# Altium PCB PCB.PcbDoc
Units mil, origin at the board's own origin, x right, y up, seen from the top; angles counter-clockwise.
Board outline 6000 x 4000 mil, 2 copper layers (Top Layer, Bottom Layer); 13 components, 143 nets, 84 pads, 0 vias.
Unrouted connection lines stored in the file: 27.
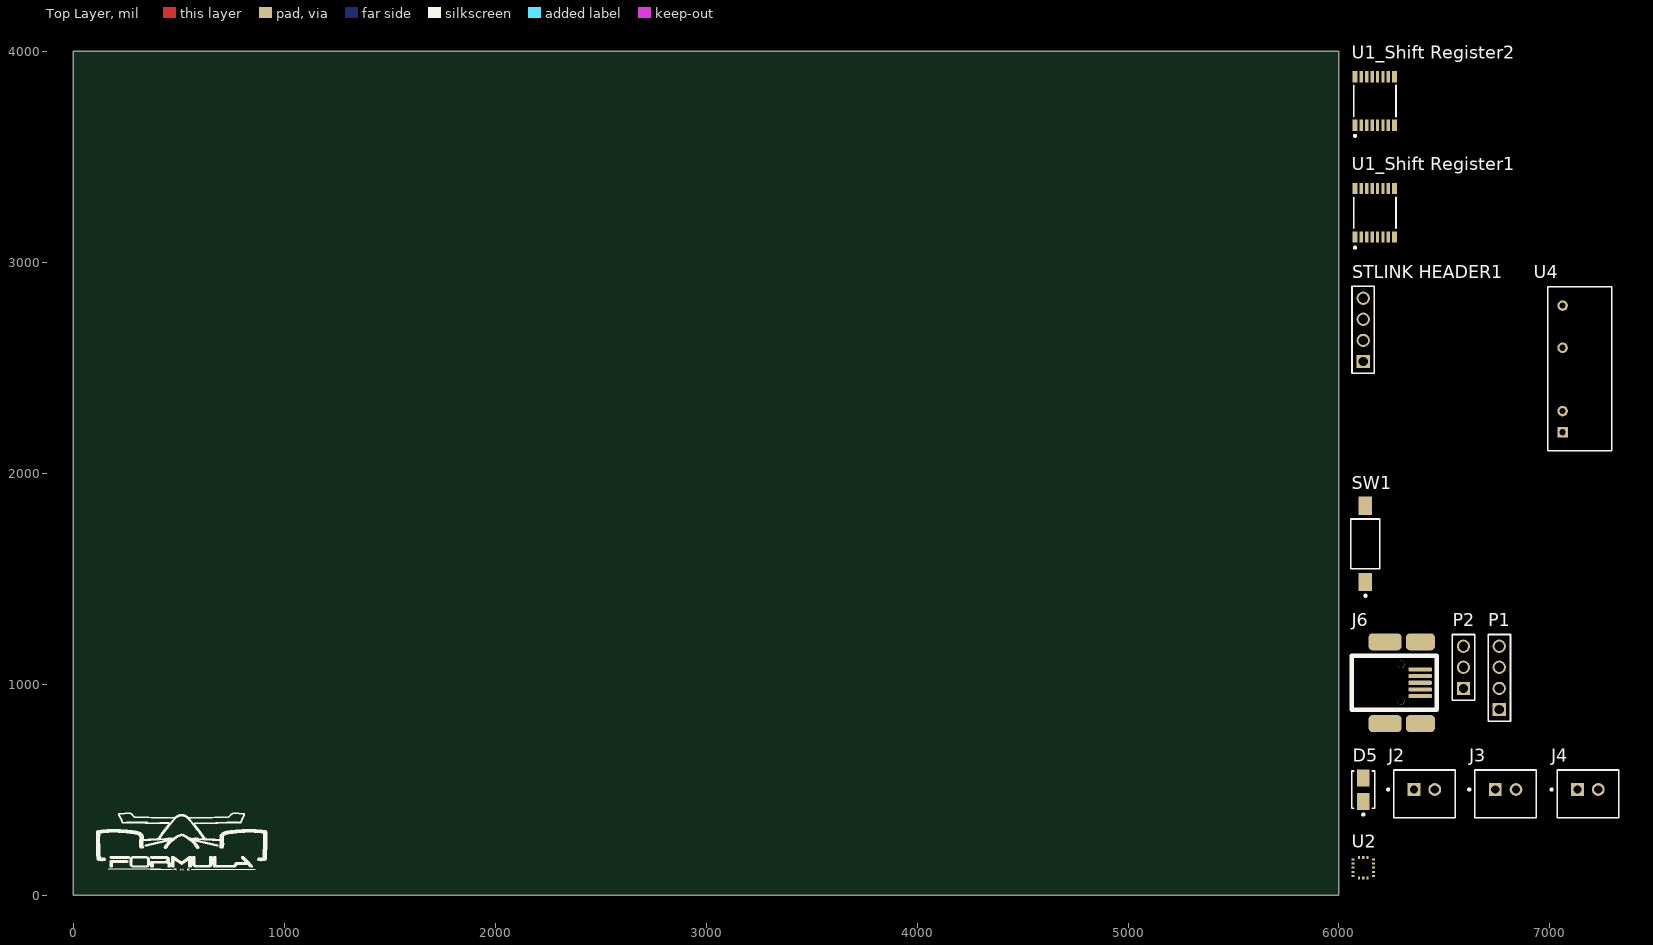
[diagram p0: Top Layer view]
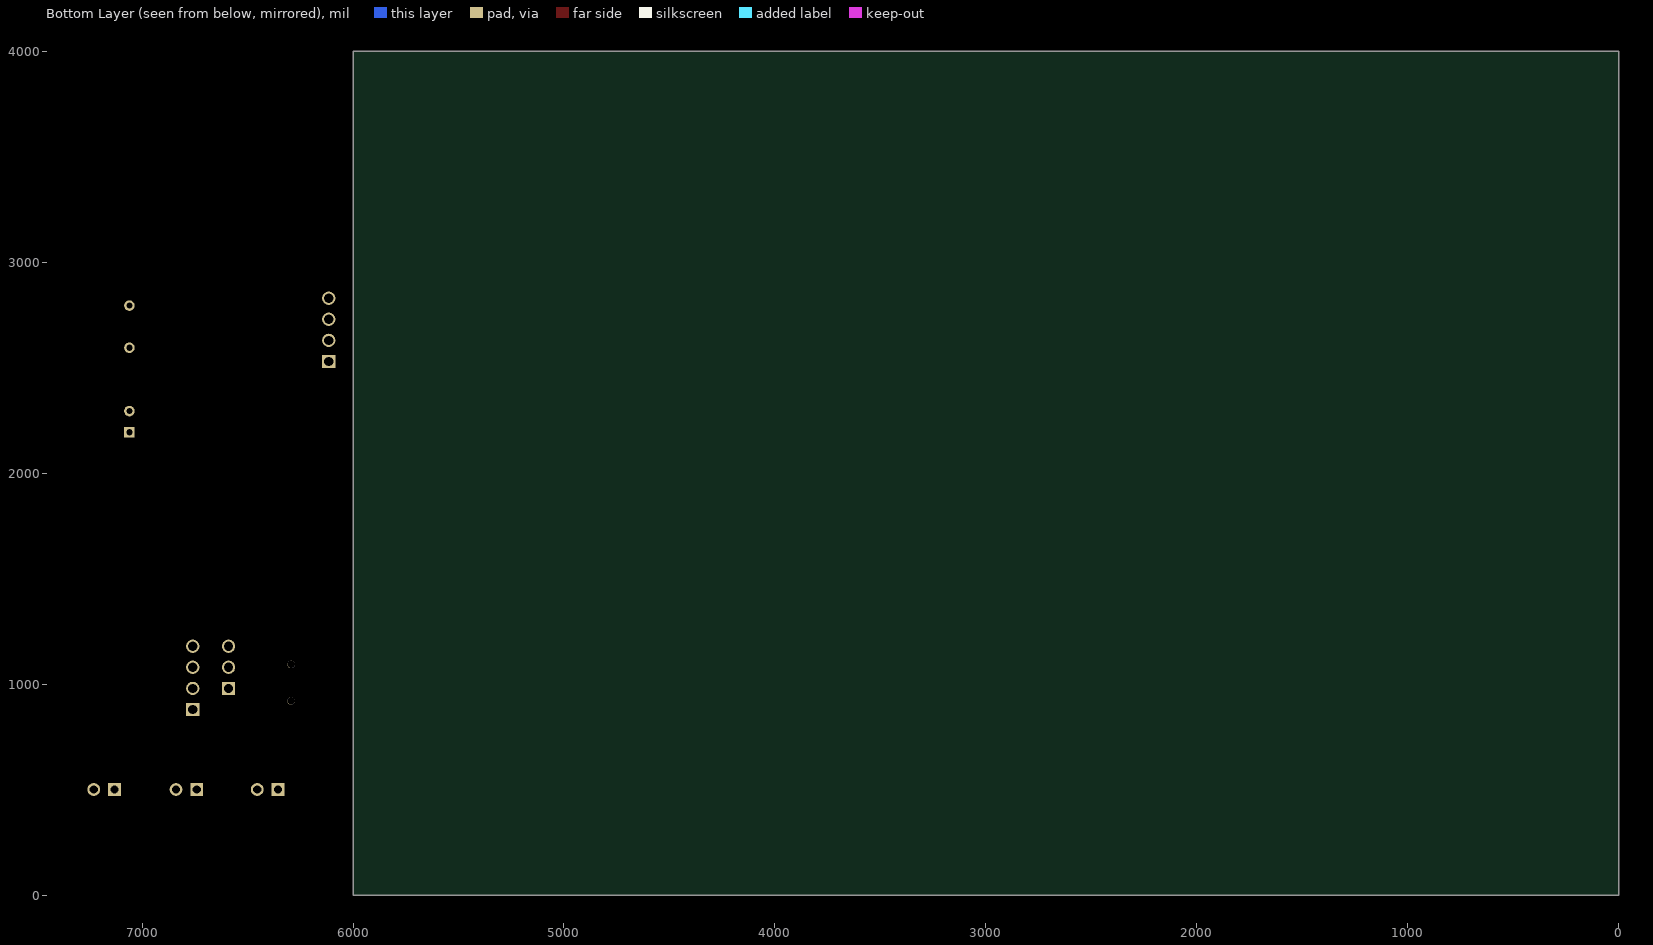
[diagram p1: Bottom Layer view, seen from below]

## Layer stack, top to bottom
Top Solder: solder mask 0.4, Solder Resist, Dk 3.5
Top Layer: signal copper 1.4
Dielectric 1: dielectric 12.6, FR-4, Dk 4.8
Bottom Layer: signal copper 1.4
Bottom Solder: solder mask 0.4, Solder Resist, Dk 3.5

## Board outline
0,0 6000,0 6000,4000 0,4000

## Design rules (kind name [scope] priority, off if disabled: settings)
BoardOutlineClearance [All] p1: gap=7.87 ignorepadtopadclearanceinfootprint=FALSE
Clearance [All] p1: gap=5 ignorepadtopadclearanceinfootprint=FALSE except(9.84: Arc-Hole Track-Hole SMDPad-Hole THPad-Hole Via-Hole Fill-Hole Poly-Hole Region-Hole Text-Hole)
ComponentClearance [All] p1: gap=5 collisioncheckmode=3 verticalgap=5 showdistances=TRUE
DiffPairsRouting [All] p1: maxlimit=10 minlimit=5 mostfreqgap=5 toplayer_minwidth=5 toplayer_maxwidth=1000 toplayer_prefwidth=5 bottomlayer_minwidth=5 bottomlayer_maxwidth=1000 bottomlayer_prefwidth=5 maxuncoupledlength=500
Height [All] p1: minheight=0 maxheight=71497.94 prefheight=500
HoleSize [All] p1: absolutevalues=TRUE maxlimit=248.03 minlimit=11.81 maxpercent=80.000 minpercent=20.000
HoleToHoleClearance [All] p1: gap=9.84 allowstackedmicrovias=FALSE
MinimumAnnularRing [All] p1: minimumring=3
MinimumSolderMaskSliver [All] p1: minsoldermaskwidth=0
PlaneClearance [All] p1: clearance=5
PlaneConnect PlaneConnectPowerPads [InPadClass('PowerPads')] p1: planeconnectstyle=Direct reliefexpansion=20 reliefentries=4 reliefconductorwidth=10 reliefairgap=10
PlaneConnect [All] p2: pad.planeconnectstyle=Relief pad.reliefexpansion=11.81 pad.reliefentries=4 pad.reliefconductorwidth=5 pad.reliefairgap=5 via.planeconnectstyle=Direct via.reliefexpansion=11.81 via.reliefentries=4 via.reliefconductorwidth=5 via.reliefairgap=5
PolygonConnect PolygonConnectPowerPads [All vs (InPadClass('PowerPads'))] p1: connectstyle=Direct reliefconductorwidth=10 reliefentries=4 polygonreliefangle="90 Angle" airgapwidth=10
PolygonConnect [All] p2: thpad.connectstyle=Relief thpad.reliefconductorwidth=5 thpad.reliefentries=4 thpad.polygonreliefangle="90 Angle" thpad.airgapwidth=5 smdpad.connectstyle=Relief smdpad.reliefconductorwidth=5 smdpad.reliefentries=4 smdpad.polygonreliefangle="90 Angle" smdpad.airgapwidth=5 via.connectstyle=Direct via.reliefconductorwidth=5 via.reliefentries=4 via.polygonreliefangle="90 Angle" via.airgapwidth=5
RoomDefinition TOP [InComponentClass('TOP')] p1: confinementstyle=ConfineIn formatcopy=TRUE lockcomponents=FALSE outline 6045,2050 7310,2050 7310,3000 6045,3000
RoomDefinition "STM32 Microcontroller" [InComponentClass('STM32 Microcontroller')] p2: confinementstyle=ConfineIn formatcopy=TRUE lockcomponents=FALSE outline -1000,-1000 1000,-1000 1000,0 -1000,0
RoomDefinition Steering [InComponentClass('Steering')] p3: confinementstyle=ConfineIn formatcopy=TRUE lockcomponents=FALSE outline -1000,-1000 1000,-1000 1000,0 -1000,0
RoomDefinition "Shift Register2" [InComponentClass('Shift Register2')] p4: confinementstyle=ConfineIn formatcopy=TRUE lockcomponents=FALSE outline 6045,3580 7080,3580 7080,4065 6045,4065
RoomDefinition "Shift Register1" [InComponentClass('Shift Register1')] p5: confinementstyle=ConfineIn formatcopy=TRUE lockcomponents=FALSE outline 6045,3050 7060,3050 7060,3530 6045,3530
RoomDefinition POWER [InComponentClass('POWER')] p6: confinementstyle=ConfineIn formatcopy=TRUE lockcomponents=FALSE outline -1000,-1000 1000,-1000 1000,0 -1000,0
RoomDefinition "Motor Controller 2" [InComponentClass('Motor Controller 2')] p7: confinementstyle=ConfineIn formatcopy=TRUE lockcomponents=FALSE outline -1000,-1000 1000,-1000 1000,0 -1000,0
RoomDefinition "Motor Controller 1" [InComponentClass('Motor Controller 1')] p8: confinementstyle=ConfineIn formatcopy=TRUE lockcomponents=FALSE outline -1000,-1000 1000,-1000 1000,0 -1000,0
RoomDefinition MCU [InComponentClass('MCU')] p9: confinementstyle=ConfineIn formatcopy=TRUE lockcomponents=FALSE outline 6045,1400 6220,1400 6220,2000 6045,2000
RoomDefinition Designator9 [InComponentClass('Designator9')] p10: confinementstyle=ConfineIn formatcopy=TRUE lockcomponents=FALSE outline -1000,-1000 1000,-1000 1000,0 -1000,0
RoomDefinition Designator8 [InComponentClass('Designator8')] p11: confinementstyle=ConfineIn formatcopy=TRUE lockcomponents=FALSE outline -1000,-1000 1000,-1000 1000,0 -1000,0
RoomDefinition Designator7 [InComponentClass('Designator7')] p12: confinementstyle=ConfineIn formatcopy=TRUE lockcomponents=FALSE outline -1000,-1000 1000,-1000 1000,0 -1000,0
RoomDefinition Designator6 [InComponentClass('Designator6')] p13: confinementstyle=ConfineIn formatcopy=TRUE lockcomponents=FALSE outline -1000,-1000 1000,-1000 1000,0 -1000,0
RoomDefinition Designator5 [InComponentClass('Designator5')] p14: confinementstyle=ConfineIn formatcopy=TRUE lockcomponents=FALSE outline -1000,-1000 1000,-1000 1000,0 -1000,0
RoomDefinition Designator4 [InComponentClass('Designator4')] p15: confinementstyle=ConfineIn formatcopy=TRUE lockcomponents=FALSE outline -1000,-1000 1000,-1000 1000,0 -1000,0
RoomDefinition Designator3 [InComponentClass('Designator3')] p16: confinementstyle=ConfineIn formatcopy=TRUE lockcomponents=FALSE outline -1000,-1000 1000,-1000 1000,0 -1000,0
RoomDefinition Designator2 [InComponentClass('Designator2')] p17: confinementstyle=ConfineIn formatcopy=TRUE lockcomponents=FALSE outline -1000,-1000 1000,-1000 1000,0 -1000,0
RoomDefinition Designator1 [InComponentClass('Designator1')] p18: confinementstyle=ConfineIn formatcopy=TRUE lockcomponents=FALSE outline -1000,-1000 1000,-1000 1000,0 -1000,0
RoomDefinition Connectors [InComponentClass('Connectors')] p19: confinementstyle=ConfineIn formatcopy=TRUE lockcomponents=FALSE outline 6045,760 6830,760 6830,1350 6045,1350
RoomDefinition CONNECTORS [InComponentClass('CONNECTORS')] p20: confinementstyle=ConfineIn formatcopy=TRUE lockcomponents=FALSE outline 6045,760 6830,760 6830,1350 6045,1350
RoomDefinition CAN2 [InComponentClass('CAN2')] p21: confinementstyle=ConfineIn formatcopy=TRUE lockcomponents=FALSE outline -1000,-1000 1000,-1000 1000,0 -1000,0
RoomDefinition CAN1 [InComponentClass('CAN1')] p22: confinementstyle=ConfineIn formatcopy=TRUE lockcomponents=FALSE outline -1000,-1000 1000,-1000 1000,0 -1000,0
RoomDefinition "Accelerometer And Gyro" [InComponentClass('Accelerometer And Gyro')] p23: confinementstyle=ConfineIn formatcopy=TRUE lockcomponents=FALSE outline 6045,60 6185,60 6185,300 6045,300
RoomDefinition "12V Power And Ground" [InComponentClass('12V Power And Ground')] p24: confinementstyle=ConfineIn formatcopy=TRUE lockcomponents=FALSE outline -1000,-1000 1000,-1000 1000,0 -1000,0
RoomDefinition "5V Power and Ground" [InComponentClass('5V Power and Ground')] p25: confinementstyle=ConfineIn formatcopy=TRUE lockcomponents=FALSE outline -1000,-1000 1000,-1000 1000,0 -1000,0
RoomDefinition 5VLS6 [InComponentClass('5VLS6')] p26: confinementstyle=ConfineIn formatcopy=TRUE lockcomponents=FALSE outline -1000,-1000 1000,-1000 1000,0 -1000,0
RoomDefinition 5VLS5 [InComponentClass('5VLS5')] p27: confinementstyle=ConfineIn formatcopy=TRUE lockcomponents=FALSE outline -1000,-1000 1000,-1000 1000,0 -1000,0
RoomDefinition 5VLS4 [InComponentClass('5VLS4')] p28: confinementstyle=ConfineIn formatcopy=TRUE lockcomponents=FALSE outline -1000,-1000 1000,-1000 1000,0 -1000,0
RoomDefinition 5VLS3 [InComponentClass('5VLS3')] p29: confinementstyle=ConfineIn formatcopy=TRUE lockcomponents=FALSE outline -1000,-1000 1000,-1000 1000,0 -1000,0
RoomDefinition 5VLS2 [InComponentClass('5VLS2')] p30: confinementstyle=ConfineIn formatcopy=TRUE lockcomponents=FALSE outline -1000,-1000 1000,-1000 1000,0 -1000,0
RoomDefinition 5VLS1 [InComponentClass('5VLS1')] p31: confinementstyle=ConfineIn formatcopy=TRUE lockcomponents=FALSE outline -1000,-1000 1000,-1000 1000,0 -1000,0
RoutingVias [All] p1: holewidth=11.81 width=23.62 viastyle="Through Hole" minholewidth=11.81 minwidth=23.62 maxholewidth=23.62 maxwidth=259.84
SilkToSilkClearance [All] p1: silktosilkclearance=0
SilkToSolderMaskClearance [IsPad] p1: minsilkscreentomaskgap=5 clearancetoexposedcopper=TRUE
SolderMaskExpansion [All] p1: expansion=2.95 istentingtop=FALSE
Width [All] p1: maxlimit=1000 minlimit=5 preferedwidth=5 minimp=50.000000 maximp=50.000000 favimp=50.000000
20 further rules are at their usual default settings.

## Classes and differential pairs
channel class Single_12V: "Motor Controller 1" "Motor Controller 2" Steering
channel class shiftRegister: "Shift Register1" "Shift Register2"
channel class CAN: CAN1 CAN2
channel class 12V_LS: Designator1 Designator2 Designator3 Designator4 Designator5 Designator6 Designator7 Designator8 Designator9
channel class 5V_LS: 5VLS1 5VLS2 5VLS3 5VLS4 5VLS5 5VLS6
component class Steering: J8_Steering
component class "Shift Register2": "C41_Shift Register2" "U1_Shift Register2"
component class "Shift Register1": "C41_Shift Register1" "U1_Shift Register1"
component class POWER: C34 C35 C36 C37 D3 D4 R22 R23 VR1
component class "Motor Controller 2": "J8_Motor Controller 2"
component class "Motor Controller 1": "J8_Motor Controller 1"
component class Designator9: C38_Designator9 C39_Designator9 C40_Designator9 IC5_Designator9 R10_Designator9 R11_Designator9
component class Designator8: C38_Designator8 C39_Designator8 C40_Designator8 IC5_Designator8 R10_Designator8 R11_Designator8
component class Designator7: C38_Designator7 C39_Designator7 C40_Designator7 IC5_Designator7 R10_Designator7 R11_Designator7
component class Designator6: C38_Designator6 C39_Designator6 C40_Designator6 IC5_Designator6 R10_Designator6 R11_Designator6
component class Designator5: C38_Designator5 C39_Designator5 C40_Designator5 IC5_Designator5 R10_Designator5 R11_Designator5
component class Designator4: C38_Designator4 C39_Designator4 C40_Designator4 IC5_Designator4 R10_Designator4 R11_Designator4
component class Designator3: C38_Designator3 C39_Designator3 C40_Designator3 IC5_Designator3 R10_Designator3 R11_Designator3
component class Designator2: C38_Designator2 C39_Designator2 C40_Designator2 IC5_Designator2 R10_Designator2 R11_Designator2
component class Designator1: C38_Designator1 C39_Designator1 C40_Designator1 IC5_Designator1 R10_Designator1 R11_Designator1
component class CONNECTORS: J6 L1 P1 P2 R24 R25
component class CAN2: C18_CAN2 C19_CAN2 IC3_CAN2 R6_CAN2 S2_CAN2
component class CAN1: C18_CAN1 C19_CAN1 IC3_CAN1 R6_CAN1 S2_CAN1
component class "Accelerometer And Gyro": C22 C23 C24 C25 U2
component class "12V Power And Ground": 4 J7
component class "5V Power and Ground": 1 J5 R8
component class 5VLS6: C20_5VLS6 C21_5VLS6 IC4_5VLS6 R7_5VLS6 R9_5VLS6
component class 5VLS5: C20_5VLS5 C21_5VLS5 IC4_5VLS5 R7_5VLS5 R9_5VLS5
component class 5VLS4: C20_5VLS4 C21_5VLS4 IC4_5VLS4 R7_5VLS4 R9_5VLS4
component class 5VLS3: C20_5VLS3 C21_5VLS3 IC4_5VLS3 R7_5VLS3 R9_5VLS3
component class 5VLS2: C20_5VLS2 C21_5VLS2 IC4_5VLS2 R7_5VLS2 R9_5VLS2
component class 5VLS1: C20_5VLS1 C21_5VLS1 IC4_5VLS1 R7_5VLS1 R9_5VLS1
differential pair USB_D: +USB_D_P -USB_D_N
differential pair CAN2: +CAN2_P -CAN2_N
differential pair CAN1: +CAN1_P -CAN1_N

## Components (designator, comment, footprint, x,y, rotation, side; value= is the part's Value field where it differs from the comment)
D5 "SMAJ14A-E3/61" VISH-DO-214AC-2_L 6115,500 r90 top
J2 "B2B-XH-A(LF)(SN)" FP-B2B-XH-A_LF_SN-MFG 6405,480 r0 top
J3 "B2B-XH-A(LF)(SN)" FP-B2B-XH-A_LF_SN-MFG 6790,480 r0 top
J4 "B2B-XH-A(LF)(SN)" FP-B2B-XH-A_LF_SN-MFG 7180,480 r0 top
J6 "67503-1020" MOLX-67503-1020_V 6385,1070 r0 top
P1 "61300411121" 61300411121 6760,1030 r90 top
P2 "61300311121" 61300311121 6590,1080 r90 top
"STLINK HEADER1" "61300411121" 61300411121 6115,2680 r90 top
SW1 "FSMSM" TECO-FSMSM-2_V 6125,1665 r90 top
"U1_Shift Register1" "74HC595PW,118" FP-SOT403-1-MFG 6170,3235 r90 top (schematic designator U1)
"U1_Shift Register2" "74HC595PW,118" FP-SOT403-1-MFG 6170,3765 r90 top (schematic designator U1)
U2 "ICM-20602" INSE-I62-16 6115,130 r0 top
U4 "TMV 1205SHI" TMV-HI_SINGLE_TRP 7060,2195 r90 top

## Footprints (in the part's own frame and the unit in brackets; to place one, negate y for a bottom-side part, rotate by r counter-clockwise, add the part's x,y. Pads: shape width x height; smd on the part's side, far side on the other; paste and mask are expansions set on the pad)
61300311121 [mm] "Pin Header, pitch 2.54 mm, THT, Vertical, single row, 3p"
  rect 1.6x1.6 hole 1.1: 1(-2.54,0)
  round 1.6 hole 1.1: 2(0,0) 3(2.54,0)
  silkscreen extent -3.96,-1.35 3.96,1.35, body extent -3.81,-1.27 3.81,1.27, height 8.57
61300411121 [mm] "Pin Header, pitch 2.54 mm, THT, Vertical, single row, 4p"
  rect 1.6x1.6 hole 1.1: 1(-3.81,0)
  round 1.6 hole 1.1: 2(-1.27,0) 3(1.27,0) 4(3.81,0)
  silkscreen extent -5.23,-1.35 5.23,1.35, body extent -5.08,-1.27 5.08,1.27, height 8.57
FP-B2B-XH-A_LF_SN-MFG [mm]
  rect 1.55x1.55 hole 1 paste-1000 mask+0: 1(-1.25,0.525)
  round 1.55 hole 1 paste-1000 mask+0: 2(1.25,0.525)
  silkscreen extent -4.5,-2.88 3.7,2.88, body extent -3.8,-2.98 3.8,2.98, height 0.25
FP-SOT403-1-MFG [mm]
  rect 1.35x0.6 smd paste-1000 mask+0: 1(-2.925,2.375) 8(-2.925,-2.375) 9(2.925,-2.375) 16(2.925,2.375)
  rect 1.35x0.4 smd paste-1000 mask+0: 2(-2.925,1.625) 3(-2.925,0.975) 4(-2.925,0.325) 5(-2.925,-0.325) 6(-2.925,-0.975) 7(-2.925,-1.625) 10(2.925,-1.625) 11(2.925,-0.975) 12(2.925,-0.325) 13(2.925,0.325) 14(2.925,0.975) 15(2.925,1.625)
  silkscreen extent -4.32,-2.55 1.88,2.55, body extent -3.72,-2.9 3.72,2.9, height 0.25
INSE-I62-16 [mm] "LGA, 16-Leads, Body 3x3mm, Pitch 0.5mm"
  rect 0.35x0.25 smd: 1(-1.225,1) 2(-1.225,0.5) 3(-1.225,0) 4(-1.225,-0.5) 5(-1.225,-1) 9(1.225,-1) 10(1.225,-0.5) 11(1.225,0) 12(1.225,0.5) 13(1.225,1)
  rect 0.25x0.35 smd: 6(-0.5,-1.225) 7(0,-1.225) 8(0.5,-1.225) 14(0.5,1.225) 15(0,1.225) 16(-0.5,1.225)
  body extent -1.5,-1.5 1.5,1.5, height 0.8
MOLX-67503-1020_V [mm] "Mini USB Connector, SMT, Righer Angle"
  rrect50% 2.8x0.5 smd: 1(0,0) 2(0,-0.8) 3(0,-1.6) 4(0,-2.4) 5(0,-3.2)
  rrect50% 3.5x2.05 smd: 6(0.025,3.325) 8(0.025,-6.525)
  rrect50% 4x2.05 smd: 7(-4.225,3.325) 9(-4.225,-6.525)
  round 0.9 hole 0.9 unplated: X(-2.325,-3.8) Y(-2.325,0.6)
  silkscreen extent -8.25,-4.85 2,1.65, body extent -8.22,-6.56 0.78,3.34, height 3.95
TECO-FSMSM-2_V [mm] "SMD, 2-Leads, Body 6x3.5mm, Pitch 9.19mm"
  rect 2.2x1.6 smd: 1(-4.595,0)
  rect 2.18x1.6 smd: 2(4.595,0)
  silkscreen extent -6.37,-1.75 3,1.75, body extent -4.98,-1.75 4.98,1.75, height 4.4
TMV-HI_SINGLE_TRP [mil]
  rect 50x50 / inner round 60 / far side rect 50x50 hole 30 paste-25 mask+0: 1(0,0)
  round 50 / inner round 60 / far side round 50 hole 30 paste-25 mask+0: 2(100,0) 5(400,0) 7(600,0)
  silkscreen extent -88,-234 690,71, body extent -84,-147 684,147, height 402
VISH-DO-214AC-2_L [mm] "DO-214AC, 2-Leads, Body 4.5x2.79mm, IPC High Density"
  rect 2.05x1.45 smd: 1(-1.425,0) 2(1.425,0)
  silkscreen extent -3.12,-1.4 2.25,1.4, body extent -2.25,-1.4 2.25,1.4, height 2.29

## Part data
D5: library part CMP-0548-00224-2, "Transient Voltage Suppressor, 6.40 to 231 V, 14 V Stand-off Voltage, Uni-Directional, -55 to 155 degC, 2-pin DO-214AC, Pb-Free, Tape and Reel", Manufacturer="Vishay Semiconductor", Operating Junction and Storage Temperature Range="-55 to 150 degC", ComponentLink1Description="Manufacturer URL", ComponentLink1URL=http://www.vishay.com/, ComponentLink2Description=Datasheet, ComponentLink2URL=http://www.vishay.com/docs/88390/smaj50a.pdf, ComponentLink3Description="Package Specification", ComponentLink3URL=http://www.vishay.com/docs/88390/smaj50a.pdf, DatasheetVersion=12/8/2013, ID (uA)=1, IFSM="40 A", Mounting Technology="Surface Mount", PackageDescription="2-Pin DO-214AC (SMA), Body 4.245 x 2.665 mm", PackageReference=DO-214AC-2, Packing="Tape and Reel", PartNumber=SMAJ14A-E3/61, PPPM (W)="400, 300", RoHS=TRUE, VBR Uni-Directional (V)="6.4 to 231", VWM (V)=14
J2 J3 J4: library part CMP-2000-05888-3, "CONN HEADER VERT 2POS 2.5MM", Color=Natural, Contact Resistance=20mR, Current Rating=3A, Housing Color=White, Insulation Resistance=1GR, Max Operating Temperature=85°C, Max Voltage Rating (AC)=250V, Min Operating Temperature=-25°C, Connector Type="Male Pin", Contact Material=Brass, Contact Plating=Tin, Contact Type="Male Pin", Depth=5.75mm, Fastening Type=Detent, Housing Material=Polyamide, Lead Free="Lead Free", Lead Pitch=2.5mm, Length=7.4mm, Max Current Rating=3A, Max Voltage Rating (DC)=250V, Mount="Through Hole", Number of Contacts=2, Number of Positions=2, Number of Rows=1, Orientation=Straight, Packaging=Bulk, Pitch=2.5mm, REACH SVHC="No SVHC", Series=XH, Termination=Solder, Voltage Rating=250V, Voltage Rating (AC)=250V, Wire/Cable Gauge=22AWG
J6: library part CMP-0411-00002-1, "USB, MINI, SMD, RA KME04-USBMU03A01", Manufacturer=Molex, ComponentLink1Description="Manufacturer URL", ComponentLink1URL=http://www.molex.com/, ComponentLink2Description=Datasheet, ComponentLink2URL=http://www.molex.com/pdm_docs/sd/675031020_sd.pdf, DatasheetVersion="Rev F, 06/2009", Mounting Technology="Surface Mount", PackageDescription="Mini USB Connector, SMT, Righer Angle", PackageReference=67503-1020, PartNumber=67503-1020, Terminal Pitch="0.8 mm"
P1 "STLINK HEADER1": library part CMP-1502-01064-1, "THT Vertical Pin Header WR-PHD, Pitch 2.54 mm, Single Row, 4 pins", Contact Resistance=20mOhm, Manufacturer="Wurth Elektronik", Operating Temperature=-40to105degC, Rated Current=3A, Withstanding Voltage=500VAC, Working Voltage=250VAC, Datasheet URL=https://katalog.we-online.de/em/datasheet/6130xx11121.pdf, Gender=Male, Manufacturer URL=http://www.we-online.de, Mounting Technology=THT, Orientation=Vertical, Package Reference=61300411121, Packaging=Bag, Part Number=61300411121, Pin Number=4, Pitch=2.54mm, Publisher=WurthElektronik, Row Number=Single
P2: library part CMP-1502-01062-1, "THT Vertical Pin Header WR-PHD, Pitch 2.54 mm, Single Row, 3 pins", Contact Resistance=20mOhm, Manufacturer="Wurth Elektronik", Operating Temperature=-40to105degC, Rated Current=3A, Withstanding Voltage=500VAC, Working Voltage=250VAC, Datasheet URL=https://katalog.we-online.de/em/datasheet/6130xx11121.pdf, Gender=Male, Manufacturer URL=http://www.we-online.de, Mounting Technology=THT, Orientation=Vertical, Package Reference=61300311121, Packaging=Bag, Part Number=61300311121, Pin Number=3, Pitch=2.54mm, Publisher=WurthElektronik, Row Number=Single
SW1: library part CMP-2000-07511-1, "FSMSM Push Button Switch, 50 mA, -35 to 85 degC, 2-Pin SMD, RoHS, Bulk", Case\/Package=SMD/SMT, Contact Current Rating=50mA, Contact Resistance=100mOhm, Manufacturer="TE Connectivity", Max Operating Temperature=85degC, Max Voltage Rating (DC)=12V, Min Operating Temperature=-35degC, Operating Force=180gf, Package Description="2-Pin Surface Mount Device, Body 6 x 3.5 mm, Pitch 9.19 mm", Package Quantity=1000, Voltage Rating (DC)=24V, Actuator Length=1.07mm, Actuator Material=Polyamide, Contact Material=Brass, Contact Plating=Silver, Current Rating=50mA, Datasheet URL=http://www.te.com/commerce/DocumentDelivery/DDEController?Action=showdoc&DocId=Customer+Drawing%7F1437566-3%7FC2%7Fpdf%7FEnglish%7FENG_CD_1437566-3_C2_1437566_3_1_c.dwg.pdf%7F1437566-3, Datasheet Version="Rev. C2, 08/2014", Electrical Life=20000Cycles, ELV=Compliant, Illumination Type=Illuminated, Lead Free=LeadFree, Manufacturer URL=http://www.te.com/, Mechanical Life=20000Cycles, Mount=SurfaceMount, Mounting Technology=SurfaceMount, Orientation=Straight, Package Reference=FSMSM, Packaging=LoosePiece, REACH SVHC=Unknown, RoHSCompliant=true, Switch Travel=0.25mm, Termination=GullWing, Throw Configuration=SPST
"U1_Shift Register1" "U1_Shift Register2": library part CMP-14351-000004-1, "IC SHIFT REGISTER 8BIT 16TSSOP"
U2: library part CMP-2000-07589-1, "High Performance 6-Axis MEMS MotionTracking(TM) Device, 1.71 to 3.45 V, -40 to 85 degC, 16-Pin LGA, RoHS", Manufacturer=InvenSense, Max Operating Temperature=85degC, Min Operating Temperature=-40degC, Package Description="16-Pin Land Grid Array, Body 3 x 3 mm, Pitch 0.5 mm", Package Reference=I62-16, Datasheet URL=http://www.invensense.com/wp-content/uploads/2016/10/DS-000176-ICM-20602-v1.0.pdf, Datasheet Version="Rev. 1.0, 10/2016", Manufacturer URL=http://www.invensense.com/, Mounting Technology=SurfaceMount, Output Type=I2C, RoHSCompliant=True, Sensor Type=Temperature
U4: library part CMP-01539-51129758-1, "TMV 1205SHI Iso DC-DC Converter; Vin 10.8 to 13.2Vdc; Vout 5Vdc; I/O isolation 5200Vdc", Isolation Voltage=5.2kV, Max Operating Temperature=85°C, Min Operating Temperature=-40°C, Output Current=200mA, Output Power=1W, Output Voltage=5V, Depth=10.2mm, Efficiency=71%, Height=10.2mm, Length=19.5mm, Mount="Through Hole", NexarPartId=51129758, Number of Outputs=1, RoHS=Compliant, Width=7.5mm

## Nets (pads, with @x,y where several pads share a name; then routed paths per layer and width w, separated by ;. In a path a pad name is that pad's centre, name@x,y a point inside that pad or via, vN(x,y) a via of type N, cw(c..) or ccw(c..) an arc to the next point about the centre after c; other vN are vias at no path point)
5V_1_SIG: 
5V_2_SIG: 
5V_3_SIG: 
5V_4_SIG: 
5V_5_SIG: 
5V_6_SIG: 
12V_CLOCK: "U1_Shift Register2.11"
12V_DATA: "U1_Shift Register2.14"
12V_LATCH: "U1_Shift Register2.12"
BOOT0: 
BOOT1: 
CAN1_CAN1_N: 
CAN1_CAN1_P: 
CAN1_CAN2_N: 
CAN1_CAN2_P: 
CAN1_N: J3.2
CAN1_P: J3.1
CAN1_RX: 
CAN1_STBY: 
CAN1_TX: 
CAN2_N: J4.2
CAN2_P: J4.1
CAN2_RX: 
CAN2_STBY: 
CAN2_TX: 
GND: "STLINK HEADER1.1" "U1_Shift Register1.8" "U1_Shift Register1.13" "U1_Shift Register2.8" "U1_Shift Register2.13" D5.2 J2.2 J6.5 J6.6 J6.7 J6.8 J6.9 P1.1 P2.1 SW1.2 U2.8 U2.13 U4.2 U4.5
MC1_ENABLE: 
MC2_ENABLE: 
NetC21_5VLS1_2: 
NetC21_5VLS2_2: 
NetC21_5VLS3_2: 
NetC21_5VLS4_2: 
NetC21_5VLS5_2: 
NetC21_5VLS6_2: 
NetC22_1: U2.14
NetC39_Designator1_1: 
NetC39_Designator2_1: 
NetC39_Designator3_1: 
NetC39_Designator4_1: 
NetC39_Designator5_1: 
NetC39_Designator6_1: 
NetC39_Designator7_1: 
NetC39_Designator8_1: 
NetC39_Designator9_1: 
NetD1_A: 
NetD2_K: 
NetD3_K: 
NetD4_K: 
NetIC2_8: U2.6
NetIC2_14: 
NetIC2_15: 
NetIC2_20: "U1_Shift Register1.12"
NetIC2_21: "U1_Shift Register1.11"
NetIC2_23: "U1_Shift Register1.14"
NetIC2_33: U2.5
NetIC2_34: U2.2
NetIC2_35: U2.4
NetIC2_36: U2.3
NetIC2_42: 
NetIC2_46: "STLINK HEADER1.3"
NetIC2_49: "STLINK HEADER1.4"
NetIC2_51: 
NetIC2_53: 
NetIC4_5VLS1_3: "U1_Shift Register1.15"
NetIC4_5VLS1_5: 
NetIC4_5VLS2_3: "U1_Shift Register1.1"
NetIC4_5VLS2_5: 
NetIC4_5VLS3_3: "U1_Shift Register1.2"
NetIC4_5VLS3_5: 
NetIC4_5VLS4_3: "U1_Shift Register1.3"
NetIC4_5VLS4_5: 
NetIC4_5VLS5_3: "U1_Shift Register1.4"
NetIC4_5VLS5_5: 
NetIC4_5VLS6_3: "U1_Shift Register1.5"
NetIC4_5VLS6_5: 
NetIC5_Designator1_2: "U1_Shift Register2.5"
NetIC5_Designator1_5: 
NetIC5_Designator1_6: 
NetIC5_Designator2_2: "U1_Shift Register2.4"
NetIC5_Designator2_5: 
NetIC5_Designator2_6: 
NetIC5_Designator3_2: "U1_Shift Register2.3"
NetIC5_Designator3_5: 
NetIC5_Designator3_6: 
NetIC5_Designator4_2: "U1_Shift Register2.2"
NetIC5_Designator4_5: 
NetIC5_Designator4_6: 
NetIC5_Designator5_2: "U1_Shift Register2.1"
NetIC5_Designator5_5: 
NetIC5_Designator5_6: 
NetIC5_Designator6_2: "U1_Shift Register2.15"
NetIC5_Designator6_5: 
NetIC5_Designator6_6: 
NetIC5_Designator7_5: 
NetIC5_Designator7_6: 
NetIC5_Designator8_5: 
NetIC5_Designator8_6: 
NetIC5_Designator9_5: 
NetIC5_Designator9_6: 
NetJ6_1: J6.1
NetJ6_4: J6.4
NetP2_2: P2.2
NetP2_3: P2.3
NetR6_CAN1_2: 
NetR6_CAN2_2: 
NetR12_1: 
NetR18_2: 
NetR19_2: 
"NetU1_Shift Register1_6": "U1_Shift Register1.6"
"NetU1_Shift Register1_7": "U1_Shift Register1.7"
"NetU1_Shift Register1_9": "U1_Shift Register1.9"
"NetU1_Shift Register2_6": "U1_Shift Register2.6"
"NetU1_Shift Register2_7": "U1_Shift Register2.7"
"NetU1_Shift Register2_9": "U1_Shift Register2.9"
NRST_n: 
OSC_IN: 
OSC_OUT: 
RST: SW1.1
SIG_12V_1: 
SIG_12V_2: 
SIG_12V_3: 
SIG_12V_4: 
SIG_12V_5: 
SIG_12V_6: 
ST_JTCK: P1.4
ST_JTMS: P1.3
STEERING_ENABLE: 
STLINK_LED: 
T_JTCK: 
T_JTMS: 
T_SWDIO_IN: 
UART_RX: 
UART_TX: 
USART2_RX: 
USART2_TX: 
USB_5V: 
USB_D_N: J6.2
USB_D_P: J6.3
VCAP_1: 
VCC3V3: "STLINK HEADER1.2" P1.2 U2.1 U2.16
VCC3V3DEBUG: 
VCC5V: "U1_Shift Register1.10" "U1_Shift Register1.16" "U1_Shift Register2.10" "U1_Shift Register2.16" U4.7
VCC12V: D5.1 J2.1 U4.1
pads on no net: J6.X J6.Y U2.7 U2.9 U2.10 U2.11 U2.12 U2.15

## Silkscreen, mask and mechanical layers (free items; w line width, h text height)
Top Overlay:
  drawing of 13 lines, arcs and shapes, not listed

## Text inside footprints (layer, text, board x,y; h text height)
U4: Top Overlay "*" at 7085,2059.68 h0 r90; Mechanical 13 "*" at 7085,2109.68 h0 r90